# Altium PCB PCB1.PcbDoc (part 2 of 3)
Units mm, origin at the board's own origin, x right, y up, seen from the top; angles counter-clockwise.
Board outline 201 x 61 mm, 2 copper layers (Top Layer, Bottom Layer); 203 components, 113 nets, 551 pads, 592 vias.
Unrouted connection lines stored in the file: 16.
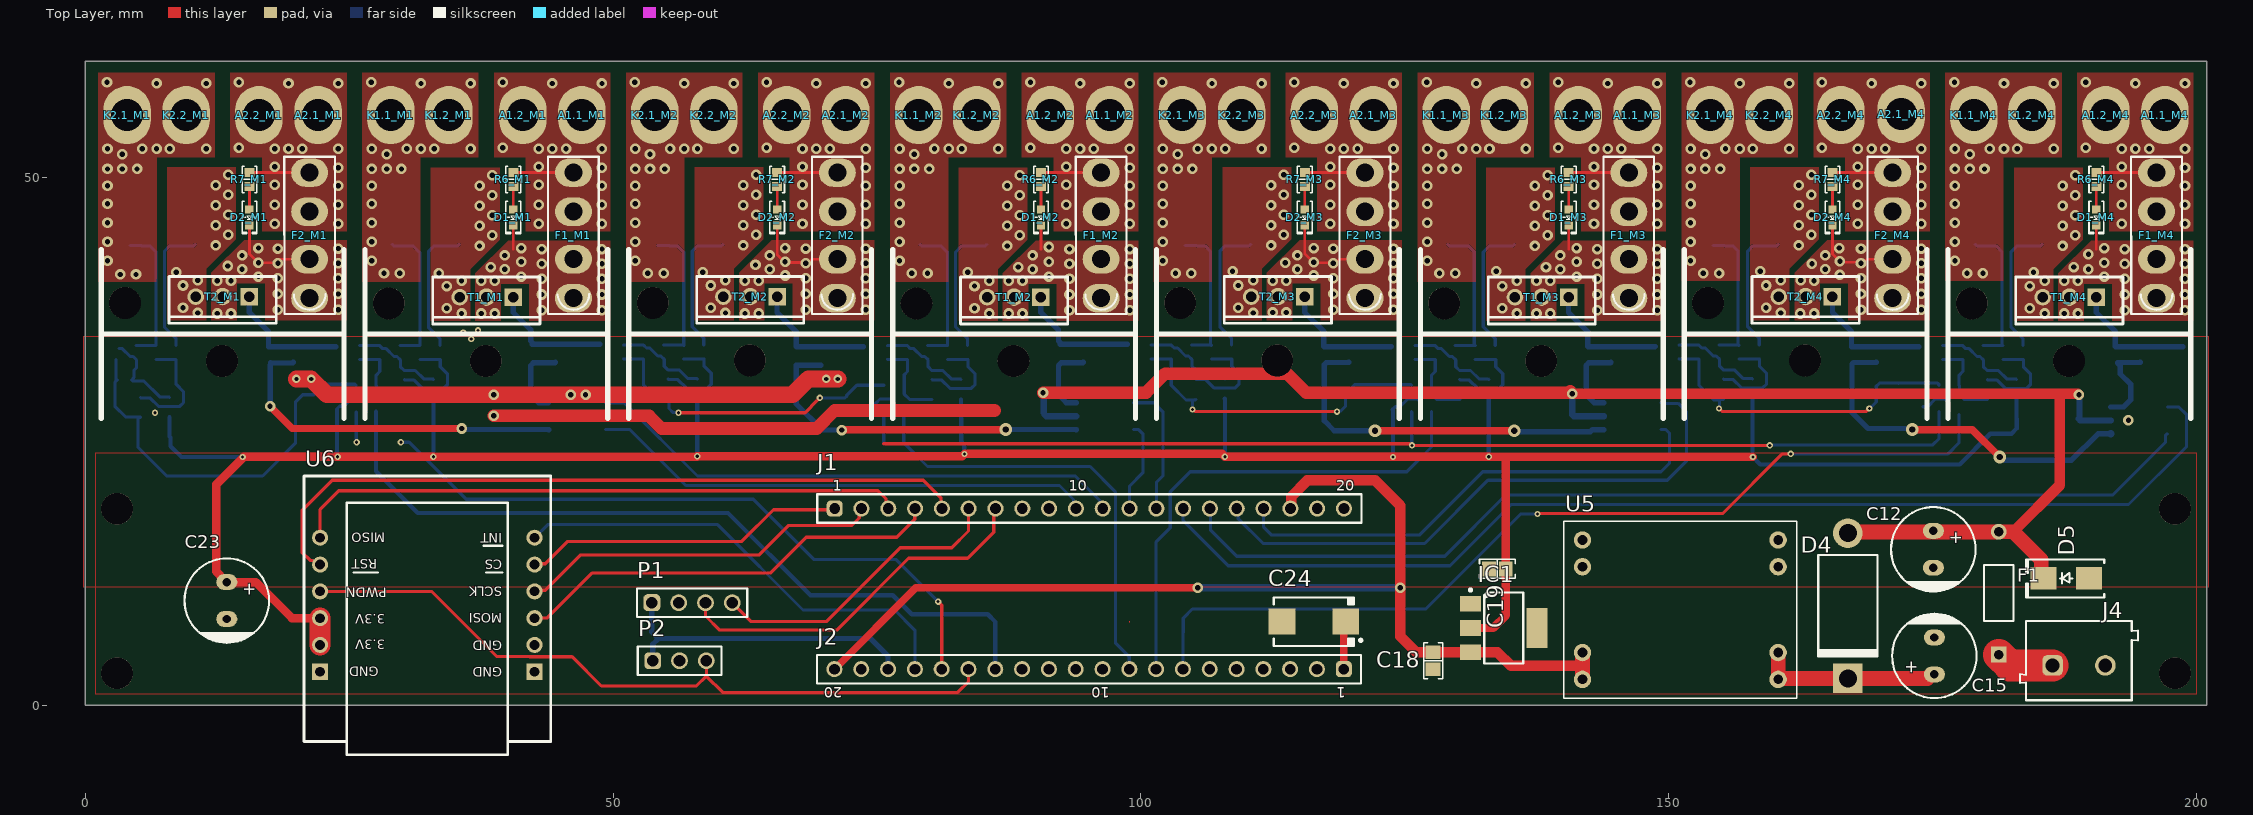
[diagram p0: Top Layer view]

## Part data (continued)
P2: "WR-PHD Pin Header, THT, pitch 2.54mm, Single Row, Vertical, 3p", Contact Resistance=20mOhm, Manufacturer="Wurth Elektronik", Operating Temperature="-40 to +105degC", Rated Current=3A, Withstanding Voltage=500VAC, Working Voltage=250VAC, ComponentLink1Description=Manufacturer, ComponentLink1URL=http://www.we-online.de, ComponentLink2Description=Datasheet, ComponentLink2URL=https://www.we-online.com/catalog/datasheet/61300311121.pdf, Gender="Pin Header", Manufacturer Part Number=61300311121, Mounting Technology=THT, Orientation=Vertical, Packaging=Bag, Pin Number=3, Pitch=2.54mm, Row Number=Single
Q1_M1 Q1_M2 Q1_M3 Q1_M4 Q2_M1 Q2_M2 Q2_M3 Q2_M4: library part PNP, "PNP Bipolar Transistor", LatestRevisionDate=29-May-2009, LatestRevisionNote="IPC-7351 Footprint Added.", PackageDescription="3-Pin SOT-23 Package 0.95 mm Pitch, 2.4 mm Lead Span", PackageReference=SOT-23B, PackageVersion=Aug-1999, Published=8-Jun-2000, Publisher="Altium Limited"
R1_M1 R1_M2 R1_M3 R1_M4 R11_M1 R11_M2 R11_M3 R11_M4: library part RC0805JR-073RL, "RES 3 OHM 5% 1/8W 0805", Device Package="0805 (2012 Metric)", Manufacturer=Yageo, Operating Temperature="-55°C ~ 155°C", Power (Watts)="0.125W, 1/8W", Supplier Device Package=0805, Supplier Part Number 1=311-3.0ARCT-ND, Temperature Coefficient=±200ppm/°C, Tolerance=±5%, ComponentLink1Description=Datasheet, ComponentLink1URL=https://www.yageo.com/upload/media/product/productsearch/datasheet/rchip/PYu-RC_Group_51_RoHS_L_10.pdf, ComponentLink2Description="DigiKey Link", ComponentLink2URL=https://www.digikey.com/en/products/detail/yageo/RC0805JR-073RL/728295, Composition="Thick Film", Features="Moisture Resistant", Height - Seated (Max)="0.024\" (0.60mm)", LastUpdated="28.02.2022 16:27:14", Lifecycle Status=Active, Minimum Order=1, Number of Terminations=2, Package / Case="0805 (2012 Metric)", Packaging=TapeAndReel, Part Number=RC0805JR-073RL, Part Status=Active, PartId=28655, Price=0.01, Resistance="3 Ohms", Series=RC_L, Size / Dimension="0.079\" L x 0.049\" W (2.00mm x 1.25mm)", Supplier 1=DigiKey
R2_M1 R2_M2 R2_M3 R2_M4 R9_M1 R9_M2 R9_M3 R9_M4 R12_M1 R12_M2 R12_M3 R12_M4 R19_M1 R19_M2 R19_M3 R19_M4: library part TNPW06035K10BYEN, "RES 5.1K OHM 0.1% 1/10W 0603", Device Package="0603 (1608 Metric)", Manufacturer="Vishay Dale", Operating Temperature="-55°C ~ 155°C", Power (Watts)="0.125W, 1/8W", Ratings=AEC-Q200, Supplier Device Package=0603, Supplier Part Number 1=541-9831-1-ND, Temperature Coefficient=±10ppm/°C, Tolerance=±0.1%, ComponentLink1Description=Datasheet, ComponentLink1URL=http://www.vishay.com/docs/28758/tnpw_e3.pdf, ComponentLink2Description="DigiKey Link", ComponentLink2URL=http://digikey.com/product-detail/en/vishay-dale/TNPW06035K10BYEN/541-9831-1-ND/9562456, Composition="Thin Film", Features="Anti-Sulfur, Automotive AEC-Q200, Moisture Resistant", Height - Seated (Max)="0.022\" (0.55mm)", LastUpdated="26.02.2022 8:48:05", Lifecycle Status=Active, Minimum Order=1, Number of Terminations=2, Package / Case="0603 (1608 Metric)", Packaging=TapeAndReel, Part Number=TNPW06035K10BYEN, Part Status=Active, PartId=5273, Price=0.27, Resistance="5.1 kOhms", Series="TNPW e3", Size / Dimension="0.061\" L x 0.033\" W (1.55mm x 0.85mm)", Supplier 1=DigiKey
R3_M1 R3_M2 R3_M3 R3_M4 R13_M1 R13_M2 R13_M3 R13_M4: library part RC0805JR-0710KP, "RES SMD 10K OHM 5% 1/8W 0805", Device Package="0805 (2012 Metric)", Manufacturer=Yageo, Operating Temperature="-55°C ~ 155°C", Power (Watts)="0.125W, 1/8W", Supplier Device Package=0805, Supplier Part Number 1=YAG1329CT-ND, Temperature Coefficient=±100ppm/°C, Tolerance=±5%, ComponentLink1Description=Datasheet, ComponentLink1URL=http://www.yageo.com/NewPortal/yageodocoutput?fileName=/pdf/R-Chip/PYu-RC_51_RoHS_P_0.pdf, ComponentLink2Description="DigiKey Link", ComponentLink2URL=https://www.digikey.com/en/products/detail/yageo/RC0805JR-0710KP/4935344, Composition="Thick Film", Features="Moisture Resistant", Height - Seated (Max)="0.024\" (0.60mm)", LastUpdated="26.02.2022 8:57:19", Lifecycle Status=Active, Minimum Order=1, Number of Terminations=2, Package / Case="0805 (2012 Metric)", Packaging=TapeAndReel, Part Number=RC0805JR-0710KP, Part Status=Active, PartId=47029, Price=0.01, Resistance="10 kOhms", Series="RC-P Lead Free", Size / Dimension="0.079\" L x 0.049\" W (2.00mm x 1.25mm)", Supplier 1=DigiKey
R4_M1 R4_M2 R4_M3 R4_M4 R5_M1 R5_M2 R5_M3 R5_M4 R14_M1 R14_M2 R14_M3 R14_M4 R15_M1 R15_M2 R15_M3 R15_M4: library part RL2512FK-070R01L, "RES 0.01 OHM 1% 1W 2512", Device Package="2512 (6432 Metric)", Manufacturer=Yageo, Operating Temperature="-55°C ~ 155°C", Power (Watts)=1W, Ratings=AEC-Q200, Supplier Device Package=2512, Supplier Part Number 1=311-.010TCT-ND, Temperature Coefficient=±1500ppm/°C, Tolerance=±1%, ComponentLink1Description=Datasheet, ComponentLink1URL=http://www.yageo.com/documents/recent/PYu-RL_Group_521_RoHS_L_2.pdf, ComponentLink2Description="DigiKey Link", ComponentLink2URL=https://www.digikey.com/en/products/detail/yageo/RL2512FK-070R01L/1037140, Composition="Thick Film", Features="Automotive AEC-Q200, Current Sense, Moisture Resistant", Height - Seated (Max)="0.026\" (0.65mm)", LastUpdated="17.02.2022 18:29:30", Lifecycle Status=Active, Minimum Order=1, Number of Terminations=2, Package / Case="2512 (6432 Metric)", Packaging=TapeAndReel, Part Number=RL2512FK-070R01L, Part Status=Active, Price=0.15, Resistance="10 mOhms", Series=RL, Size / Dimension="0.250\" L x 0.126\" W (6.35mm x 3.20mm)", Supplier 1=DigiKey
R6_M1 R6_M2 R6_M3 R6_M4 R7_M1 R7_M2 R7_M3 R7_M4: library part RC0603JR-134K7L, "RES 4.7K OHM 5% 1/10W 0603", Device Package="0603 (1608 Metric)", Manufacturer=Yageo, Operating Temperature="-55°C ~ 155°C", Power (Watts)="0.1W, 1/10W", Supplier Device Package=0603, Supplier Part Number 1=13-RC0603JR-134K7LCT-ND, Temperature Coefficient=±100ppm/°C, Tolerance=±5%, ComponentLink1Description=Datasheet, ComponentLink1URL=https://www.yageo.com/upload/media/product/productsearch/datasheet/rchip/PYu-RC_Group_51_RoHS_L_11.pdf, ComponentLink2Description="DigiKey Link", ComponentLink2URL=https://www.digikey.com/en/products/detail/yageo/RC0603JR-134K7L/13694157, Composition="Thick Film", Features="Moisture Resistant", Height - Seated (Max)="0.022\" (0.55mm)", LastUpdated="26.02.2022 8:46:15", Lifecycle Status=Active, Minimum Order=1, Number of Terminations=2, Package / Case="0603 (1608 Metric)", Packaging=CutTape, Part Number=RC0603JR-134K7L, Part Status=Active, PartId=65433, Price=0.01, Resistance="4.7 kOhms", Series=RC_L, Size / Dimension="0.063\" L x 0.031\" W (1.60mm x 0.80mm)", Supplier 1=DigiKey
R8_M1 R8_M2 R8_M3 R8_M4 R10_M1 R10_M2 R10_M3 R10_M4 R18_M1 R18_M2 R18_M3 R18_M4 R20_M1 R20_M2 R20_M3 R20_M4: library part RT0603BRD07249KL, "RES SMD 249K OHM 0.1% 1/10W 0603", Device Package="0603 (1608 Metric)", Manufacturer=Yageo, Operating Temperature="-55°C ~ 155°C", Power (Watts)="0.1W, 1/10W", Supplier Device Package=0603, Supplier Part Number 1=YAG4510CT-ND, Temperature Coefficient=±25ppm/°C, Tolerance=±0.1%, ComponentLink1Description=Datasheet, ComponentLink1URL=https://www.yageo.com/upload/media/product/productsearch/datasheet/rchip/PYu-RT_1-to-0.01_RoHS_L_11.pdf, ComponentLink2Description="DigiKey Link", ComponentLink2URL=http://digikey.com/product-detail/en/yageo/RT0603BRD07249KL/YAG4510CT-ND/6616666, Composition="Thin Film", Height - Seated (Max)="0.022\" (0.55mm)", LastUpdated="26.02.2022 8:47:50", Lifecycle Status=Active, Minimum Order=1, Number of Terminations=2, Package / Case="0603 (1608 Metric)", Packaging=TapeAndReel, Part Number=RT0603BRD07249KL, Part Status=Active, PartId=10542, Price=0.04, Resistance="249 kOhms", Series=RT, Size / Dimension="0.063\" L x 0.031\" W (1.60mm x 0.80mm)", Supplier 1=DigiKey
R16: library part RC0805JR-0710KL, "RES 10K OHM 5% 1/8W 0805", Device Package="0805 (2012 Metric)", Manufacturer=Yageo, Operating Temperature="-55°C ~ 155°C", Power (Watts)="0.125W, 1/8W", Supplier Device Package=0805, Supplier Part Number 1=311-10KARCT-ND, Temperature Coefficient=±100ppm/°C, Tolerance=±5%, ComponentLink1Description=Datasheet, ComponentLink1URL=https://www.yageo.com/upload/media/product/productsearch/datasheet/rchip/PYu-RC_Group_51_RoHS_L_10.pdf, ComponentLink2Description="DigiKey Link", ComponentLink2URL=https://www.digikey.com/en/products/detail/yageo/RC0805JR-0710KL/728241, Composition="Thick Film", Features="Moisture Resistant", Height - Seated (Max)="0.024\" (0.60mm)", LastUpdated="30.06.2022 22:38:47", Lifecycle Status=Active, Minimum Order=1, Number of Terminations=2, Package / Case="0805 (2012 Metric)", Packaging=CutTape, Part Number=RC0805JR-0710KL, Part Status=Active, PartId=38737, Price=0.01, Resistance="10 kOhms", Series=RC_L, Size / Dimension="0.079\" L x 0.049\" W (2.00mm x 1.25mm)", Supplier 1=DigiKey
T1_M1 T1_M2 T1_M3 T1_M4 T2_M1 T2_M2 T2_M3 T2_M4: library part "N-MOSFET-D 1D 2G 3S", "N-CHANNEL MOSFET WITH DIODE"
U1 U2 U3 U4: "5-V, 2:1 (SPDT), 1-channel general-purpose analog switch 6-SOT-23 -40 to 125", Package="SOT-23-6 Texas Instruments", Arrow_Electronics-Purchase-URL=https://snapeda.com/shop?store=Arrow+Electronics&id=366071, Availability=Good, Check_prices=https://www.snapeda.com/parts/SN74LVC1G3157DBVR/Texas%20Instruments/view-part/366071/?ref=eda, DigiKey-Purchase-URL=https://snapeda.com/shop?store=DigiKey&id=366071, MF="Texas Instruments", Mouser-Purchase-URL=https://snapeda.com/shop?store=Mouser&id=366071, MP=SN74LVC1G3157DBVR, Price=None, SnapEDA_Link=https://www.snapeda.com/parts/SN74LVC1G3157DBVR/Texas%20Instruments/view-part/366071/?ref=snap, Texas_Instruments-Purchase-URL=https://snapeda.com/shop?store=Texas+Instruments&id=366071
U2_M1 U2_M2 U2_M3 U2_M4: Package=None, Availability=Unavailable, MP=UCC27324D, Price=None
U3_M1 U3_M2 U3_M3 U3_M4 U4_M1 U4_M2 U4_M3 U4_M4: library part MCP6001T-E/OT, "General Purpose Amplifier 1 Circuit Rail-to-Rail SOT-23-5", Package="SOT-23-5 Microchip", Availability=Unavailable, MF=Microchip, MP=MCP6001T-E/OT, Price=None, SnapEDA_Link=https://www.snapeda.com/parts/MCP6001T-E/OT/Microchip/view-part/235076/?ref=snap
U6: "W5500 Lite ethernet board"

## Free pads (board coordinates)
  round 3 hole 3 unplated: 7(3.75,38.1) 7(12.95,32.6) 7(28.75,38.05) 7(37.95,32.6) 7(53.75,38.1) 7(62.95,32.65) 7(78.75,38.05) 7(87.95,32.6) 7(103.75,38.1) 7(112.95,32.65) 7(128.75,38.05) 7(137.95,32.6) 7(153.75,38.1) 7(162.95,32.65) 7(178.75,38.05) 7(187.95,32.6) 8(3,3) 8(3,18.6) 8(198,3) 8(198,18.6)

## Via types
v1: diameter 1, hole 0.5, Top Layer to Bottom Layer, 557 vias
v2: diameter 0.6, hole 0.3, Top Layer to Bottom Layer, 26 vias
v3: diameter 1.2, hole 0.6, Top Layer to Bottom Layer, 5 vias
v4: diameter 0.8, hole 0.4, Top Layer to Bottom Layer, 4 vias

## Nets (pads, with @x,y where several pads share a name; then routed paths per layer and width w, separated by ;. In a path a pad name is that pad's centre, name@x,y a point inside that pad or via, vN(x,y) a via of type N, cw(c..) or ccw(c..) an arc to the next point about the centre after c; other vN are vias at no path point)
3V3_A: J2.18 P1.1 P2.1 | length 29.7
  Bottom Layer w0.5: P1.1@53.68,9.7 53.68,6.92 54.3,6.3 ; P2.1@53.76,4.2 53.76,5.76 54.3,6.3 ; J2.18@76.06,3.4 76.06,4.64 74.4,6.3 54.3,6.3
3V3_B: C2_M1.2 C2_M2.2 C2_M3.2 C2_M4.2 C3_M1.2 C3_M2.2 C3_M3.2 C3_M4.2 C6.2 C7.2 C19.2 C21.2 C22.2 C23.1 IC1.2 U1.5 U2.5 U3.5 U3_M1.5 U3_M2.5 U3_M3.5 U3_M4.5 U4.5 U4_M1.5 U4_M2.5 U4_M3.5 U4_M4.5 U6.10 U6.11 | length 290.4
  Top Layer w0.8: U6.10@22.24,8.23 19.57,8.23 16.15,11.65 C23.1@13.4,11.65 13.339,11.65 12.8,12.189 12.8,12.25 12.4,12.65 12.4,20.9 15.024,23.524 23.997,23.524 24,23.527 24.004,23.523 v2(32.977,23.523) 33,23.5 57.95,23.5 57.977,23.527 v2(57.977,23.573) ; v2@58.031,23.554 83.071,23.554 v2(83.309,23.791) 107.709,23.791 v2(107.977,23.523) ; v2@107.981,23.504 123.896,23.504 v2(123.9,23.5) 123.904,23.504 132.957,23.504 v2(132.977,23.523) ; IC1.2@131.25,7.3 133.4,7.3 134.6,8.5 C19.2@134.6,13 ; v2@132.972,23.504 132.977,23.5 134.6,23.5 ; C19.2@134.6,12.9 134.6,23.5 ; v2(158,23.5) 134.6,23.5
  Top Layer w2: U6.11@22.24,5.69 U6.10@22.24,8.23
  Bottom Layer w0.3: C6.2@23.8,28.025 24.081,28.306 24.506,28.306 25.2,29 26.2,29 26.6,28.6 U1.5@26.6,27.795 ; C7.2@73.8,27.625 73.949,27.774 74.574,27.774 74.9,28.1 74.9,28.6 75.3,29 76.3,29 76.6,28.7 U2.5@76.6,27.795 ; C21.2@123.85,27.975 124.131,28.256 124.556,28.256 125.3,29 126.2,29 126.6,28.6 U3.5@126.6,27.795 ; C22.2@174.131,28.256 174.556,28.256 175.3,29 176.2,29 176.6,28.6 U4.5@176.6,27.795
  Bottom Layer w0.4: U4_M1.5@7.972,27.26 7.973,27.258 7.973,25.452 C3_M1.2@7.975,25.45 8.075,25.35 8.075,24.525 9.1,23.5 v2(14.9,23.5) ; C6.2@23.85,27.975 23.85,23.631 23.9,23.581 v2(23.9,23.527) ; U3_M1.5@32.972,28.96 32.975,28.957 C2_M1.2@32.975,27.15 ; v2@32.976,23.524 C2_M1.2@32.976,27.149 ; U4_M2.5@57.972,29.01 57.975,29.007 57.975,27.2 ; v2(57.977,23.573) 57.976,27.149 ; C2_M2.2@82.972,27.2 U3_M2.5@82.972,28.96 ; C2_M2.2@82.975,27.2 83,27.175 83,24.946 83.27,24.676 83.27,23.83 v2(83.309,23.791) ; v2(107.977,23.523) 107.976,26.1 C3_M3.2@107.975,27.15 C3_M3.2@107.976,27.199 ; v2@107.977,23.573 107.977,26.101 ; C21.2@123.85,27.975 123.9,27.925 v2(123.9,23.5) ; U3_M3.5@132.972,28.96 132.975,28.957 C2_M3.2@132.975,27.15 ; 132.976,26.05 C2_M3.2@132.975,27.15 ; v2(132.977,23.523) 132.977,26.051 ; U4_M4.5@157.972,28.96 157.975,28.957 C3_M4.2@157.975,27.15 ; v2@157.976,23.524 C3_M4.2@157.975,27.15 ; v2(158,23.5) 158.7,22.8 177.6,22.8 180.5,25.7 182.5,25.7 183,26.2 183,27.125 C2_M4.2@182.975,27.15 182.975,28.957 U3_M4.5@182.972,28.96 ; U4_M3.5@107.975,29.007 107.975,27.2 U4_M3.5@107.975,29.007 ; U4_M3.5@107.975,29.007 107.972,29.01 U4_M3.5@107.975,29.007 ; U4_M4.5@157.972,29.01 157.975,29.007 U4_M4.5@157.972,29.01
5V: C18.2 IC1.3 J1.18 J2.20 U5.7 U5.8 | length 103.3
  Top Layer w0.7: J2.20@70.98,3.4 78.68,11.1 v1(105.4,11.1)
  Top Layer w1: J1.18@114.18,18.62 114.248,18.688 114.248,19.748 115.8,21.3 122.2,21.3 124.6,18.9 v1(124.6,11.1) 124.6,6.5 126.1,5 128.3,5 131.25,5 133.8,5 135.1,3.7 141.858,3.7
  Top Layer w1.4: U5.8@141.858,2.432 141.858,3.7 U5.7@141.858,4.972
  Bottom Layer w0.7: v1(105.4,11.1) v1(124.6,11.1)
12V: C1_M1.2 C1_M2.2 C1_M3.2 C1_M4.2 C12.1 D4.1 D5.2 F1.2 U2_M1.6 U2_M2.6 U2_M3.6 U2_M4.6 | length 204.7
  Top Layer w1: v1@140.7,29.7 v1(140.9,29.5) 187.1,29.5 ; 182.675,16.425 187.1,20.85 187.1,29.5 ; v1(188.9,29.4) 188.8,29.5 187.1,29.5
  Top Layer w1.2: v1(38.7,27.4) 53.4,27.4 54.6,26.2 69.3,26.2 71,27.9 86.138,27.9 ; v1(90.75,29.6) 100.513,29.6 102.313,31.4 113.875,31.4 115.675,29.6 140.6,29.6 v1@140.7,29.7
  Top Layer w1.4: D4.1@167.114,16.394 174.717,16.394 174.823,16.5 C12.1@175.1,16.5 ; C12.1@175.1,16.404 F1.2@180.985,16.404 ; F1.2@181.3,16.425 182.675,16.425 185.325,13.775 185.325,12.375 D5.2@185.7,12
  Bottom Layer w0.6: C1_M1.2@41.033,27.368 U2_M1.6@43.898,27.368 ; v1(90.75,29.6) 90.825,29.525 90.825,27.725 C1_M2.2@90.8,27.7 ; C1_M2.2@90.894,27.506 91.035,27.365 U2_M2.6@93.9,27.365 ; v1(140.9,29.5) C1_M3.2@140.9,27.5 141.035,27.365 U2_M3.6@143.9,27.365 ; v1(188.9,29.4) 188.95,29.35 188.95,27.213 188.869,27.131 189.035,26.965 U2_M4.6@191.9,26.965
  Bottom Layer w0.7: v1(38.7,27.4) 40.4,27.4 C1_M1.2@40.6,27.6
  other v1: 193.591,26.991
ADC0: C4_M1.2 R10_M1.2 U1.3 U3_M1.1 | length 7.8
  Bottom Layer w0.3: C4_M1.2@26,32.725 26.025,32.75 R10_M1.2@27.9,32.75 27.9,31.6 27.55,31.25 U1.3@27.55,30.305 ; U1.3@27.601,30.254 27.601,29.949 27.606,29.945 28.079,29.945 29.063,28.96 U3_M1.1@30.228,28.96
ADC1: C5_M1.2 C9.1 R20_M1.2 U1.1 U4_M1.1 | length 38
  Bottom Layer w0.3: C5_M1.2@2.9,30.8 R20_M1.2@2.9,32.75 ; C5_M1.2@3.025,30.8 2.8,30.575 2.8,28.3 3.8,27.3 5,27.3 5.04,27.26 U4_M1.1@5.228,27.26 ; U4_M1.1@5,27.26 5,24.4 7.7,21.7 16.8,21.7 19.9,24.8 19.9,28.7 20.6,29.4 21.575,29.4 C9.1@21.6,29.375 21.65,29.375 22.675,30.4 25.555,30.4 U1.1@25.65,30.305
ADC2: C4_M2.2 R10_M2.2 U2.3 U3_M2.1 | length 8.2
  Bottom Layer w0.3: C4_M2.2@76,32.725 76.025,32.75 R10_M2.2@77.9,32.75 77.9,31.6 77.597,31.297 77.597,30.265 77.594,30.261 77.594,29.46 78.093,28.96 U3_M2.1@80.228,28.96
ADC3: C5_M2.2 C10.1 R20_M2.2 U2.1 U4_M2.1 | length 29.4
  Top Layer w0.3: v2(56.2,27.7) 68.2,27.7 69.364,28.864
  Bottom Layer w0.3: C5_M2.2@51,32.775 51.025,32.8 52.9,32.8 R20_M2.2@52.9,32.75 52.9,30.3 54.294,28.906 55.174,28.906 U4_M2.1@55.228,28.96 ; U4_M2.1@55.3,28.831 55.3,28.1 55.689,27.711 56.189,27.711 v2(56.2,27.7) ; v2(69.6,29.1) 71.975,29.1 72.15,29.275 72.15,29.35 73.105,30.305 U2.1@75.65,30.305
ADC4: C4_M3.2 R10_M3.2 U3.3 U3_M3.1 | length 8.2
  Bottom Layer w0.3: C4_M3.2@126,32.725 126.025,32.75 R10_M3.2@127.9,32.75 127.9,31.6 127.55,31.25 U3.3@127.55,30.305 ; U3.3@127.55,30.305 127.567,30.288 127.567,29.433 128.04,28.96 U3_M3.1@130.228,28.96
ADC5: C5_M3.2 C13.1 R20_M3.2 U3.1 U4_M3.1 | length 30.8
  Top Layer w0.3: v2(104.9,28) 104.981,28 105.181,27.8 v2(118.6,27.8)
  Bottom Layer w0.3: C5_M3.2@101,32.775 101.025,32.8 102.9,32.8 102.9,30.3 104.294,28.906 104.9,28.906 105.174,28.906 U4_M3.1@105.228,28.96 ; v2(104.9,28) U4_M3.1@104.9,28.831 ; v2(118.6,27.8) 118.657,27.857 118.957,27.857 119.4,28.3 119.4,29.5 120.275,30.375 C13.1@121.8,30.375 125.58,30.375 U3.1@125.65,30.305
ADC6: C4_M4.2 R10_M4.2 U3_M4.1 U4.3 | length 8.2
  Bottom Layer w0.3: C4_M4.2@176,32.725 176.025,32.75 R10_M4.2@177.9,32.75 177.9,31.6 177.55,31.25 U4.3@177.55,30.305 177.567,30.288 177.567,29.433 178.04,28.96 U3_M4.1@180.228,28.96
ADC7: C5_M4.2 C16.2 R20_M4.2 U4.1 U4_M4.1 | length 31.4
  Top Layer w0.3: v2(154.8,28.1) 154.826,28.1 155.126,27.8 168.715,27.8 169.015,28.1 v2(169.041,28.1)
  Bottom Layer w0.3: C5_M4.2@151,32.775 151.025,32.8 152.9,32.8 152.9,30.3 154.294,28.906 U4_M4.1@154.9,28.906 ; v2(154.8,28.1) 154.826,28.126 154.826,28.831 154.955,28.96 U4_M4.1@155.228,28.96 ; v2(169.041,28.1) 169.087,28.1 169.7,28.713 169.7,30.2 170,30.5 171.775,30.5 C16.2@171.8,30.475 ; C16.2@171.775,30.5 175.51,30.5 175.65,30.36 U4.1@175.65,30.305 U4.1@175.58,30.375

## Text inside footprints (layer, text, board x,y; h text height)
C12: Top Overlay "+" at 176.35,16.5 h2 r270
C15: Top Overlay "+" at 173.95,2.9 h2 r90
C23: Top Overlay "+" at 14.65,11.65 h2 r270
J1: Top Overlay "10" at 93.18,20.32 h1.02; Top Overlay "1" at 70.81,20.32 h1.02; Top Overlay "20" at 118.53,20.32 h1.02
J2: Top Overlay "10" at 97.06,1.7 h1.02 r180; Top Overlay "1" at 119.43,1.7 h1.02 r180; Top Overlay "20" at 71.71,1.7 h1.02 r180
U6: Top Overlay "GND" at 39.512,3.572 h0.89 r180; Top Overlay "GND" at 39.512,6.112 h0.89 r180; Top Overlay "MOSI" at 39.512,8.675 h0.89 r180; Top Overlay "SCLK" at 39.512,11.215 h0.89 r180; Top Overlay "CS" at 39.512,13.755 h0.89 r180; Top Overlay "INT" at 39.512,16.272 h0.89 r180; Top Overlay "GND" at 27.803,3.633 h0.89 r180; Top Overlay "3.3V" at 28.438,6.173 h0.89 r180; Top Overlay "3.3V" at 28.438,8.586 h0.89 r180; Top Overlay "PWDN" at 28.565,11.126 h0.89 r180; Top Overlay "RST" at 27.676,13.793 h0.89 r180; Top Overlay "MISO" at 28.438,16.333 h0.89 r180